# Altium PCB BLE_breakout_20mmThrough.PcbDoc
Units mil, origin at the board's own origin, x right, y up, seen from the top; angles counter-clockwise.
Board outline 870 x 725 mil, 2 copper layers (Top Layer, Bottom Layer); 4 components, 5 nets, 29 pads, 1 vias.
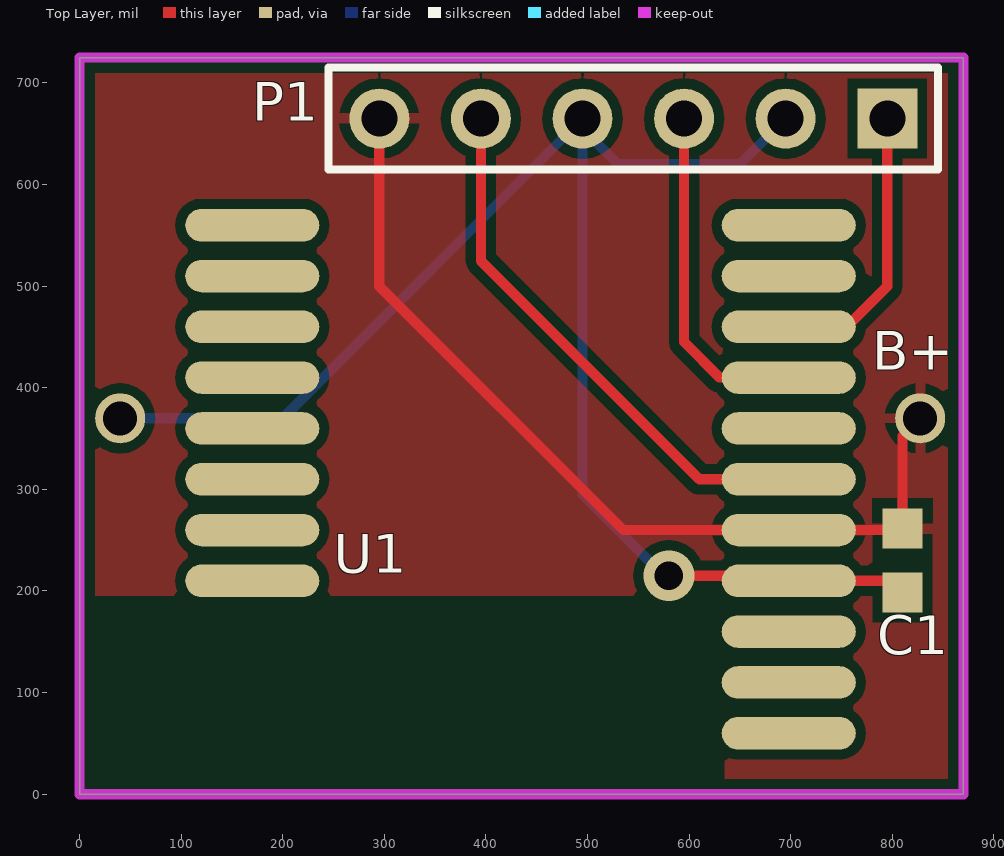
[diagram p0: Top Layer view]
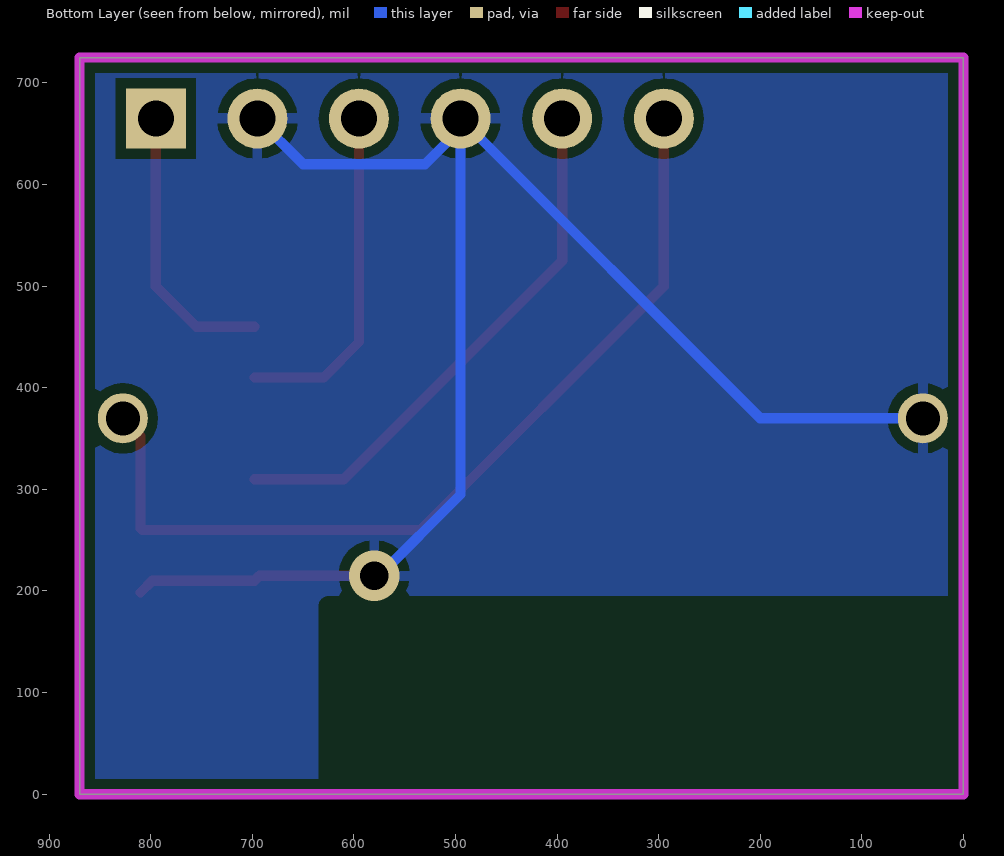
[diagram p1: Bottom Layer view, seen from below]

## Layer stack, top to bottom
Top Solder: solder mask 0.4, Solder Resist, Dk 3.5
Top Layer: signal copper 1.4
Dielectric 1: dielectric 12.6, FR-4, Dk 4.8
Bottom Layer: signal copper 1.4
Bottom Solder: solder mask 0.4, Solder Resist, Dk 3.5

## Board outline
0,0 870,0 870,725 0,725

## Design rules (kind name [scope] priority, off if disabled: settings)
Clearance [All] p1: gap=10 ignorepadtopadclearanceinfootprint=FALSE except(0: Arc-Hole Track-Hole SMDPad-Hole THPad-Hole Via-Hole Fill-Hole Poly-Hole Region-Hole Text-Hole)
PolygonConnect [All] p1: connectstyle=Relief reliefconductorwidth=10 reliefentries=4 polygonreliefangle="90 Angle" airgapwidth=10
RoomDefinition BLE_breakout [InComponentClass('BLE_breakout')] p1: confinementstyle=ConfineIn formatcopy=TRUE lockcomponents=FALSE outline -5745,-1275 -3745,-1275 -3745,-275 -5745,-275
RoutingVias [All] p1: holewidth=28 width=50 viastyle="Through Hole" minholewidth=28 minwidth=50 maxholewidth=28 maxwidth=50
SolderMaskExpansion [All] p1: expansion=4
Width [All] p1: maxlimit=10 minlimit=10 preferedwidth=10
30 further rules are at their usual default settings.

## Components (designator, comment, footprint, x,y, rotation, side; value= is the part's Value field where it differs from the comment)
B+ "Battery" Battery_type1 827.4,370 r180 top (schematic designator B1)
C1 "Cap 0.1µF" CAPC1608N 810,230 r90 top
P1 "Header 6" HDR1X6 795,665 r180 top
U1 "BLE Module" BLE_module 134,10 r0 top

## Footprints (in the part's own frame and the unit in brackets; to place one, negate y for a bottom-side part, rotate by r counter-clockwise, add the part's x,y. Pads: shape width x height; smd on the part's side, far side on the other; paste and mask are expansions set on the pad)
Battery_type1 [mm] "20mm through-hole, 3V"
  round 1.25 hole 0.85: 1(0,0) 2(20,0)
BLE_module [mil]
  rrect100% 132x32 smd: 1(36,200) 2(36,250) 3(36,300) 4(36,350) 5(36,400) 6(36,450) 7(36,500) 8(36,550) 9(564,50) 10(564,100) 11(564,150) 12(564,200) 13(564,250) 14(564,300) 15(564,350) 16(564,400) 17(564,450) 18(564,500) 19(564,550)
CAPC1608N [mm] "Chip Capacitor, Body 1.6x0.8mm, IPC Medium Density"
  rect 1x1 smd: 1(-0.8,0) 2(0.8,0)
  body extent -0.87,-0.48 0.87,0.48, height 0.85
HDR1X6 [mm] "Connector; Header; 6 Position"
  rect 1.5x1.5 hole 0.9: 1(0,0)
  round 1.5 hole 0.9: 2(2.54,0) 3(5.08,0) 4(7.62,0) 5(10.16,0) 6(12.7,0)
  silkscreen extent -1.27,-1.27 13.97,1.27

## Part data
B+: Capacity=120mAh, Manufacturer=Panasonic, Manufacturer Part Number=BR1632A/HAN, Max Operating Temperature=80°C, Min Operating Temperature=-30°C, Output Voltage=3V, Package Quantity=30, Supplier Part Number 1=40T0041, Chemistry/Technology=Lithium, ComponentLink1Description=https://datasheet.ciiva.com/14617/70196958-14617420.pdf, ComponentLink1URL=https://datasheet.ciiva.com/14617/70196958-14617420.pdf, Lead Free="Lead Free", Number of Pins=2, Pricing 1="1=3.3, 5=2.81, 10=2.64, 25=2.43, 50=2.19, 100=1.98, 250=1.77 (USD)", Stock 1=129, Supplier 1=Newark, Weight=1.5g
C1: "CAP CER 0.1UF 16V X7R 0603", Capacitance=0.1µF, Manufacturer=Yageo, Manufacturer Part Number=CC0603KRX7R7BB104, Operating Temperature="-55°C ~ 125°C", Package / Case="0603 (1608 Metric)", Ratings=-, Supplier Part Number 1=311-1088-1-ND, Temperature Coefficient=X7R, Tolerance=±10%, Voltage - Rated=16V, Applications="General Purpose", Category=Capacitors, ComponentLink1Description=http://www.yageo.com/documents/recent/UPY-GPHC_X7R_6.3V-to-50V_18.pdf, ComponentLink1URL=http://www.yageo.com/documents/recent/UPY-GPHC_X7R_6.3V-to-50V_18.pdf, Failure Rate=-, Features=-, Height - Seated (Max)=-, Lead Spacing=-, Lead Style=-, Mounting Type="Surface Mount, MLCC", Packaging="Cut Tape (CT)", Part Status=Active, Pricing 1="1=0.1, 10=0.021, 100=0.0095, 500=0.00676, 1000=0.00531 (USD)", RoHS="RoHS Compliant", Size / Dimension="0.063\" L x 0.031\" W (1.60mm x 0.80mm)", Stock 1=3332544, Supplier 1=Digi-Key, Thickness (Max)="0.035\" (0.90mm)"
P1: "Header, 6-Pin", LatestRevisionDate=17-Jul-2002, LatestRevisionNote="Re-released for DXP Platform.", Publisher="Altium Limited"
U1: Case/Package=SMD/SMT, Current - Receiving=12mA, Frequency=2.4GHz, Manufacturer="RF Digital", Manufacturer Part Number=RFD22301, Max Operating Temperature=75°C, Min Operating Temperature=-25°C, Operating Supply Voltage=3V, Package Quantity=90, Supplier Part Number 1=801-1689, ComponentLink1Description=https://datasheet.ciiva.com/24153/rfd22301-data-sheet-11-24-13-11-38pm-24153411.pdf, ComponentLink1URL=https://datasheet.ciiva.com/24153/rfd22301-data-sheet-11-24-13-11-38pm-24153411.pdf, Current - Transmitting=12mA, Data Rate=8Mbps, Interface=SPI,UART, Mount="Surface Mount", Packaging=Tray, Sensitivity=-93dBm, Stock 1=0, Supplier 1=RSComponents

## Via types
v1: diameter 50, hole 28, Top Layer to Bottom Layer, 1 vias

## Nets (pads, with @x,y where several pads share a name; then routed paths per layer and width w, separated by ;. In a path a pad name is that pad's centre, name@x,y a point inside that pad or via, vN(x,y) a via of type N, cw(c..) or ccw(c..) an arc to the next point about the centre after c; other vN are vias at no path point)
3V: B+.1 C1.2 P1.6 U1.13 | length 895.7
  Top Layer w10: P1.6 295,500 535,260 U1.13 808.5,260 C1.2 810,352.6 B+.1
GND: B+.2 C1.1 P1.2 P1.4 U1.12 | length 1535.3
  Top Layer w10: v1(580,215) 693,215 U1.12 798.5,210 C1.1
  Bottom Layer w10: B+.2 200,370 P1.4 P1.4@495,655 ; v1(580,215) 575,215 495,295 P1.4@495,655 ; P1.2 650,620 530,620 P1.4@495,655
GPIO0: P1.3 U1.16 | length 337.5
  Top Layer w10: P1.3 595,445 630,410 U1.16
GPIO1: P1.1 U1.17 | length 278.6
  Top Layer w10: U1.17 755,460 795,500 P1.1
R\S\T\: P1.5 U1.14 | length 532.1
  Top Layer w10: P1.5 395,525 610,310 U1.14
pads on no net: U1.1 U1.2 U1.3 U1.4 U1.5 U1.6 U1.7 U1.8 U1.9 U1.10 U1.11 U1.15 U1.18 U1.19

## Polygon pours and split planes (outlines as drawn)
3V on Top Layer "Top Layer-3V" (solid, pour order 0): 0,0 870,0 870,725 0,725
GND on Bottom Layer "Bottom Layer-GND" (solid, pour order 1): 0,0 870,0 870,725 0,725

## Keep-outs
Keep-Out Layer:
  the board outline again, w10

## Dimensions
870,0 to 870,725 on Mechanical 1
0,0 to 870,0 on Mechanical 13